# EAGLE board bluetooth_juicer_shield_pcb_design (EAGLE 9.5.1)
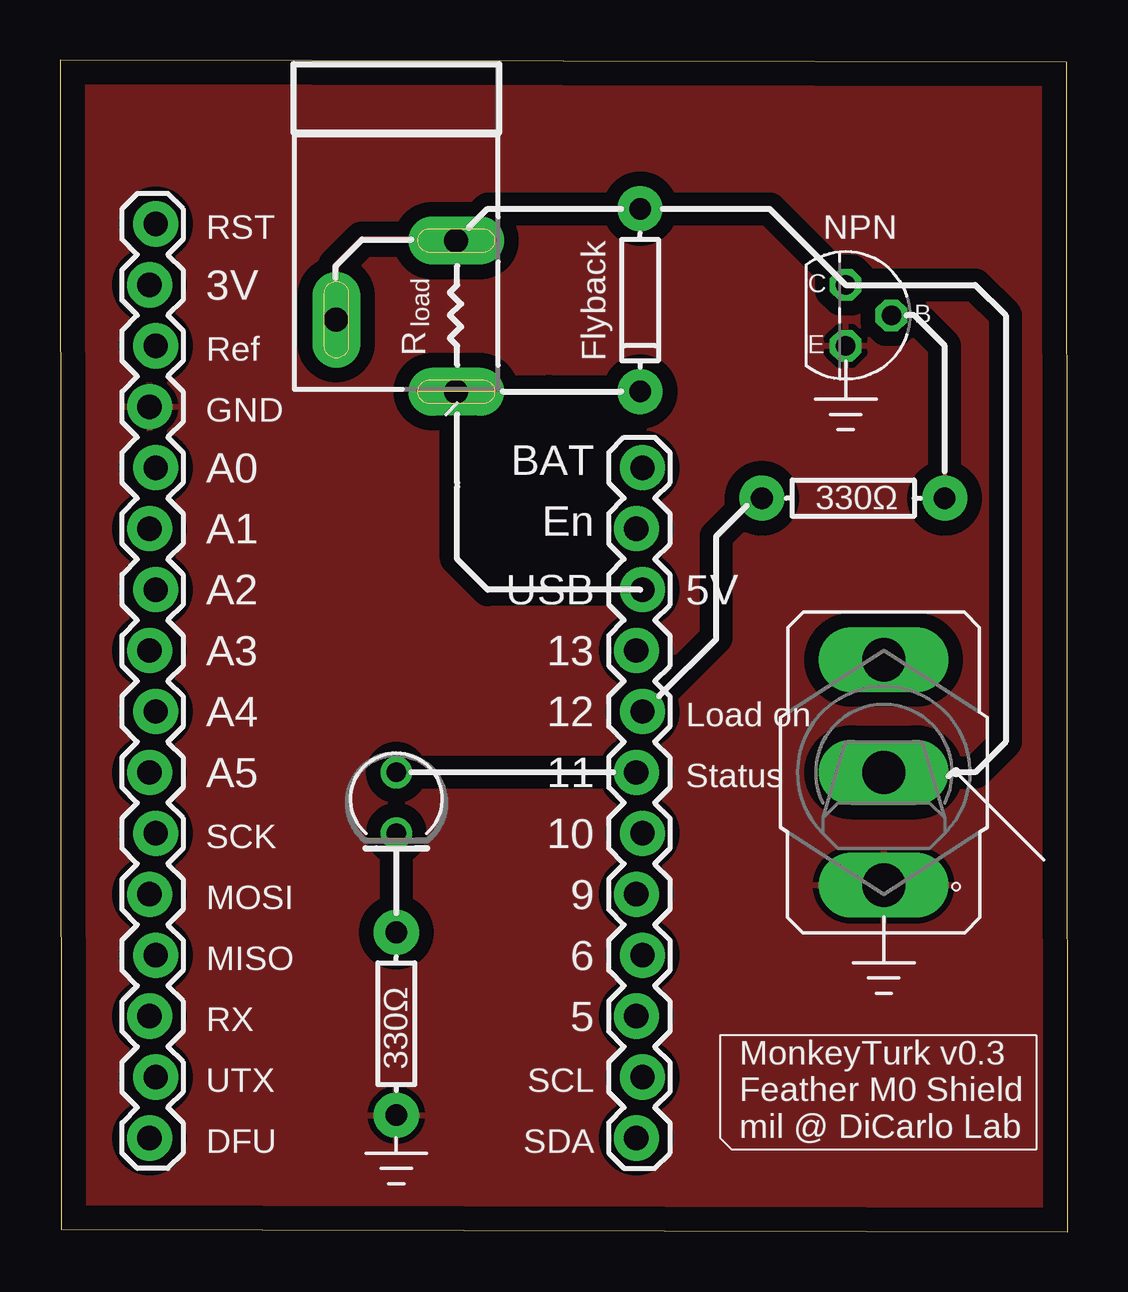
[diagram p0: board, top side]
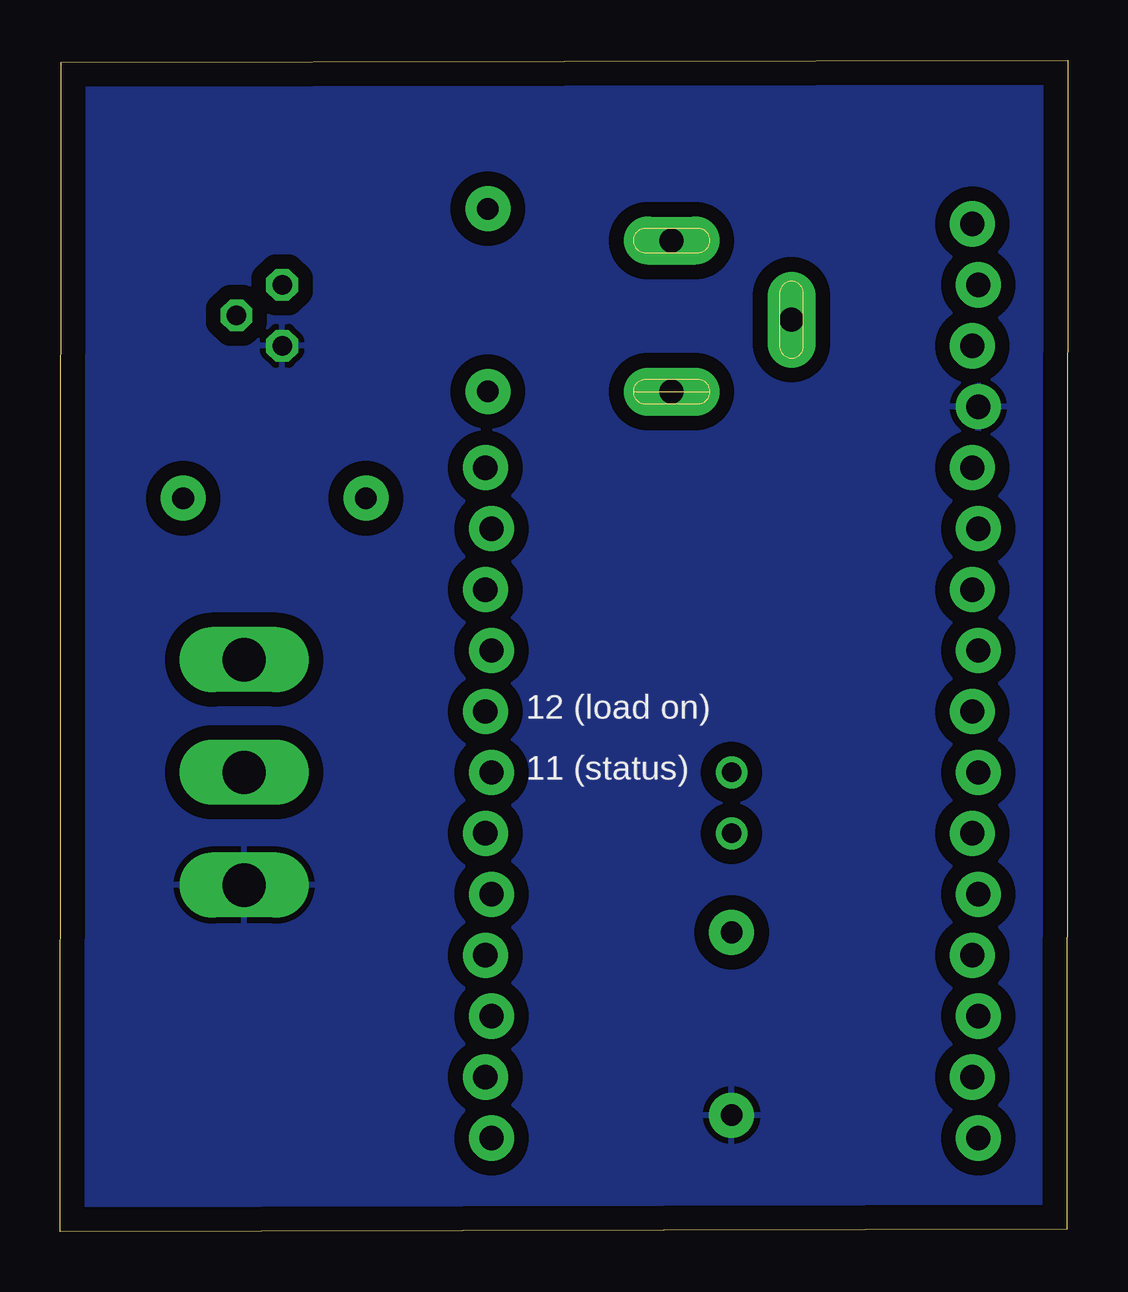
[diagram p1: board, bottom side, seen from below]

Size 42.02 x 48.85 mm. Coordinates in mm from the lower left corner, seen from the top.
Outline: 0.05,0.1 42.02,0 41.97,48.75 0,48.85 0.05,0.1
Copper layers (1*16): Top 0.035mm / dielectric 1.5mm / Bottom 0.035mm
Design rules "default": minimum track width 6mil, minimum drill 0.35mm, track to track 6mil, track to pad 6mil, pad to pad 6mil, via to via 6mil, smd to smd 6mil, copper to edge 40mil, drill to drill 6mil, minimum pad ring 10mil, minimum via ring 8mil, stop-mask expansion 4mil, vias tented up to drill 0mil, thermal gap 10mil

## Footprints (pad centres in the part's own frame; a part is rotated, then mirrored left to right if it is on the bottom)
LED_3MM-NS = drill 0.813: A -1.27,0; K 1.27,0
DIODE-1N4148-KIT = drill 0.9 pad 1.88: A -3.81,0; C 3.81,0
1X12_LOCK = drill 1.016 pad 1.88: 1 0,0.127; 2 2.54,-0.127; 3 5.08,0.127; 4 7.62,-0.127; 5 10.16,0.127; 6 12.7,-0.127; 7 15.24,0.127; 8 17.78,-0.127; 9 20.32,0.127; 10 22.86,-0.127; 11 25.4,0.127; 12 27.94,-0.127
1X16_LOCK = drill 1.016 pad 1.88: 1 0,0.127; 2 2.54,-0.127; 3 5.08,0.127; 4 7.62,-0.127; 5 10.16,0.127; 6 12.7,-0.127; 7 15.24,0.127; 8 17.78,-0.127; 9 20.32,0.127; 10 22.86,-0.127; 11 25.4,0.127; 12 27.94,-0.127; 13 30.48,0.127; 14 33.02,-0.127; 15 35.56,0.127; 16 38.1,-0.127
POWER_JACK_SLOT = drill 1 pad 2 long: GND@1 2.58,7.5; GND@2 7.58,10.8; PWR 2.58,13.8
AXIAL-0.3 = drill 0.9 pad 1.88: P$1 -3.81,0; P$2 3.81,0
M9040P = drill 1.803 long: 1 0,4.699; 2 0,0; 3 0,-4.699
TO92 = drill 0.813 octagon: 1 1.27,0; 2 0,1.905; 3 -1.27,0

## Placement (x,y rotation side)
D2  [LED_3MM-NS]  14.02,17.88 270 top
FLYBACK  200mA/100V/1V  [DIODE-1N4148-KIT]  24.18,38.84 270 top
J1  [1X12_LOCK]  24.16,3.91 90 top
J2  [1X16_LOCK]  3.86,42.01 270 top
J3  POWER_JACKSLT  [POWER_JACK_SLOT]  19.1,48.82 180 top
RBASE  330  [AXIAL-0.3]  33.07,30.58 0 top
RLED  330  [AXIAL-0.3]  14.02,8.67 90 top
S1  [M9040P]  34.34,19.15 0 top
T1  BC337  [TO92]  32.75,38.2 270 top

## Library data of the parts
D2 = SparkFun-LED
FLYBACK = SparkFun-DiscreteSemi; PROD_ID: DIO-08378
J1 J2 = SparkFun-Connectors
J3 = SparkFun-Connectors; PROD_ID: PRT-00119
RBASE RLED = SparkFun-Resistors; PROD_ID: RES-8371
S1 = switch
T1 = transistor

## Nets
GND: J2.4 RLED.P$1 S1.3 T1.1
N$1: J1.8 RBASE.P$1
N$2: FLYBACK.C J1.10 J3.PWR
N$3: RBASE.P$2 T1.2
N$4: FLYBACK.A J3.GND@1 J3.GND@2 S1.2 T1.3
N$5: D2.A J1.7
N$6: D2.K RLED.P$2

## Tracks (layer width: path | path; a pad name or v marks a point on that pad's centre or on a via)
GND
  pour Top (isolate 0.61): 0.05,48.82 0.05,0.1 41.96,0.1 41.96,48.82
  pour Bottom (isolate 0.61): 0.05,48.82 0.05,0.1 41.96,0.1 41.96,48.82
N$1
  Top 0.152: J1.8 27.36,24.76 27.36,28.99 28.94,30.58 RBASE.P$1
N$2
  Top 0.152: J1.10 17.83,26.77 16.52,28.08 J3.PWR 20.37,35.02 20.37,35.03 FLYBACK.C
N$3
  Top 0.152: RBASE.P$2 36.88,36.93 35.61,38.2 T1.2
N$4
  Top 0.152: S1.2 38.15,19.15 39.42,20.42 39.42,38.2 38.15,39.47 T1.3 29.58,42.65 FLYBACK.A 17.85,42.65 J3.GND@1 15.55,41.32
  Top 0.254: J3.GND@2 11.52,40.23 11.48,40.27 12.59,41.38 15.5,41.38 15.55,41.32
N$5
  Top 0.152: J1.7 D2.A
N$6
  Top 0.152: D2.K RLED.P$2

## Text on the board
tPlace: RST | NPN | load | 3V | C | B | R | Ref | Flyback | E | GND | A0 | BAT | 330Ω | En | A1 | A2 | USB | 5V | A3 | 13 | A4 | 12 | Load on | A5 | 11 | Status | SCK | 10 | MOSI | 9 | MISO | 6 | RX | 5 | 330Ω | UTX | SCL | MonkeyTurk v0.3 / Feather M0 Shield / mil @ DiCarlo Lab | DFU | SDA
bPlace: 12 (load on) | 11 (status)